# EAGLE board Rear_left_lamp_v2 (EAGLE 7.3.0)
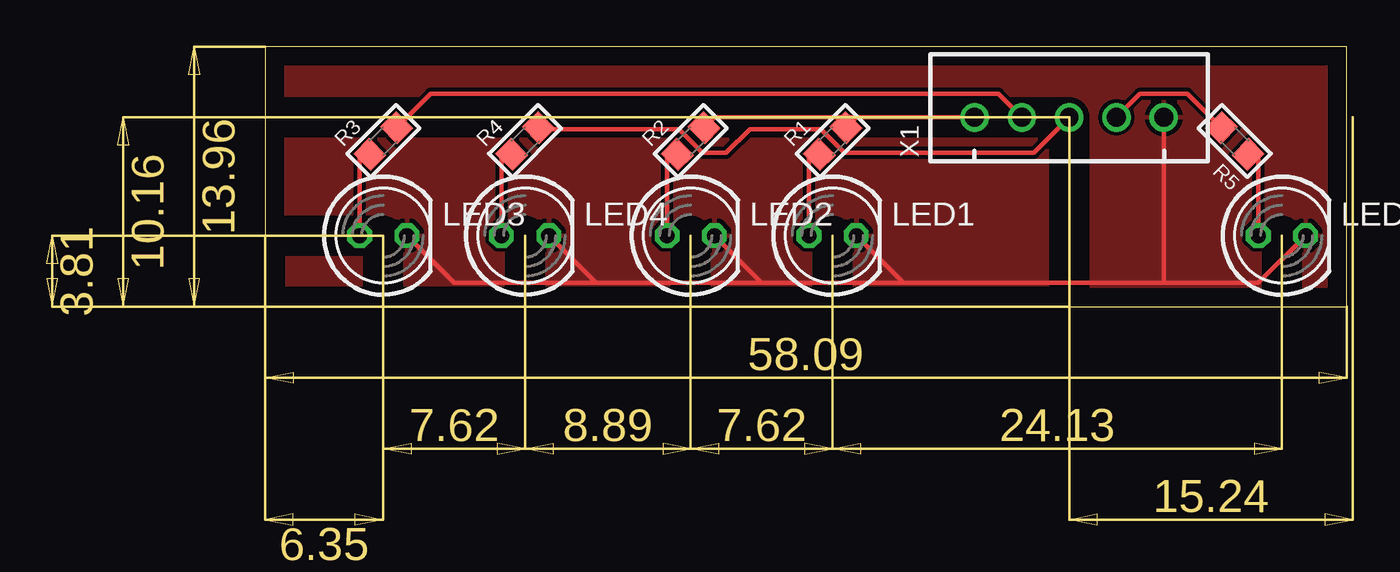
[diagram p0: board, top side]

Size 58.09 x 13.96 mm. Coordinates in mm from the lower left corner, seen from the top.
Outline: 0,0 58.09,0 58.09,13.96 0,13.96 0,0
Copper layers (1*16): Top 0.035mm / dielectric 1.5mm / Bottom 0.035mm
Design rules "default": minimum track width 10mil, minimum drill 24mil, track to track 8mil, track to pad 8mil, pad to pad 8mil, via to via 8mil, smd to smd 8mil, copper to edge 40mil, drill to drill 8mil, minimum pad ring 10mil, minimum via ring 8mil, stop-mask expansion 4mil, vias tented up to drill 0mil, thermal gap 10mil

## Footprints (pad centres in the part's own frame; a part is rotated, then mirrored left to right if it is on the bottom)
LED5MM = drill 0.813 octagon: A -1.27,0; K 1.27,0
R0805 = smd 1.2 x 1.3: 1 -1.016,0; 2 1.016,0
JST-XH-05-PACKAGE-ROUND-PAD = drill 1.016: 1 -5.08,0; 2 -2.54,0; 3 0,0; 4 2.54,0; 5 5.08,0

## Placement (x,y rotation side)
LED1  1.83 V  [LED5MM]  30.48,3.81 0 top
LED2  1.83 V  [LED5MM]  22.86,3.81 0 top
LED3  1.88 V  [LED5MM]  6.35,3.81 0 top
LED4  1.83 V  [LED5MM]  13.97,3.81 0 top
LED5  2.58 V  [LED5MM]  54.61,3.81 0 top
R1  6K8  [R0805]  30.48,8.89 45 top
R2  6K8  [R0805]  22.86,8.89 45 top
R3  680  [R0805]  6.35,8.89 45 top
R4  1K  [R0805]  13.97,8.89 45 top
R5  4K7  [R0805]  52.07,8.89 135 top
X1  JST-XH-05-PIN-ROUND-PAD  [JST-XH-05-PACKAGE-ROUND-PAD]  43.18,10.16 0 top

## Library data of the parts
LED1 LED2 LED4 = led; COLOR: Red; CURRENT: 1.48 mA
LED3 = led; COLOR: Yellow; CURRENT: 1.42 mA
LED5 = led; COLOR: White; CURRENT: 0.14 mA
R1-R5 = rc-master-smd
X1 = Rembrandt Electronics - JST XH Connectors v1-0

## Nets
API_BREAK: R4.2 X1.3
API_START_ENGINE: R1.2 R2.2 X1.1
API_TURN_LEFT: R3.2 X1.2
API_WITHDRAW: R5.2 X1.4
GND: LED1.K LED2.K LED3.K LED4.K LED5.K X1.5
N$1: LED1.A R1.1
N$2: LED2.A R2.1
N$4: LED3.A R3.1
N$8: LED4.A R4.1
N$10: LED5.A R5.1

## Tracks (layer width: path | path; a pad name or v marks a point on that pad's centre or on a via)
API_BREAK
  Top 0.254: R4.2 14.77,9.53 22.23,9.53 23.5,8.26 24.77,8.26 26.04,9.53 29.84,9.53 31.11,8.26 41.27,8.26 X1.3
API_START_ENGINE
  Top 0.254: R2.2 24.13,10.16 31.75,10.16 | X1.1 33.02,10.16 31.75,10.16 | R1.2 31.75,10.16
API_TURN_LEFT
  Top 0.254: R3.2 8.89,11.43 39.37,11.43 X1.2
API_WITHDRAW
  Top 0.254: X1.4 46.99,11.43 49.53,11.43 R5.2
GND
  Top 0.254: LED3.K 10.16,1.27 17.78,1.27 | 17.78,1.27 26.67,1.27 | 26.67,1.27 34.29,1.27 | 34.29,1.27 48.26,1.27 | 48.26,1.27 53.34,1.27 LED5.K | X1.5 48.26,1.27 | LED1.K 34.29,1.27 | LED2.K 26.67,1.27 | LED4.K 17.78,1.27
  pour Top: 0,0 0,13.97 58.42,13.97 58.42,0
N$1
  Top 0.254: R1.1 29.21,8.17 LED1.A
N$2
  Top 0.254: R2.1 21.59,8.17 LED2.A
N$4
  Top 0.254: R3.1 5.08,8.17 LED3.A
N$8
  Top 0.254: R4.1 12.7,8.17 LED4.A
N$10
  Top 0.254: R5.1 53.34,8.17 LED5.A